# Altium PCB PCB1.PcbDoc
Units mil, origin at the board's own origin, x right, y up, seen from the top; angles counter-clockwise.
Board outline 720 x 1350 mil, 4 copper layers (Top Copper, Signal Layer 1, Signal Layer 2, Bottom Copper), stack 46.063 mil thick; 29 components, 18 nets, 96 pads, 42 vias.
Unrouted connection lines stored in the file: 31.
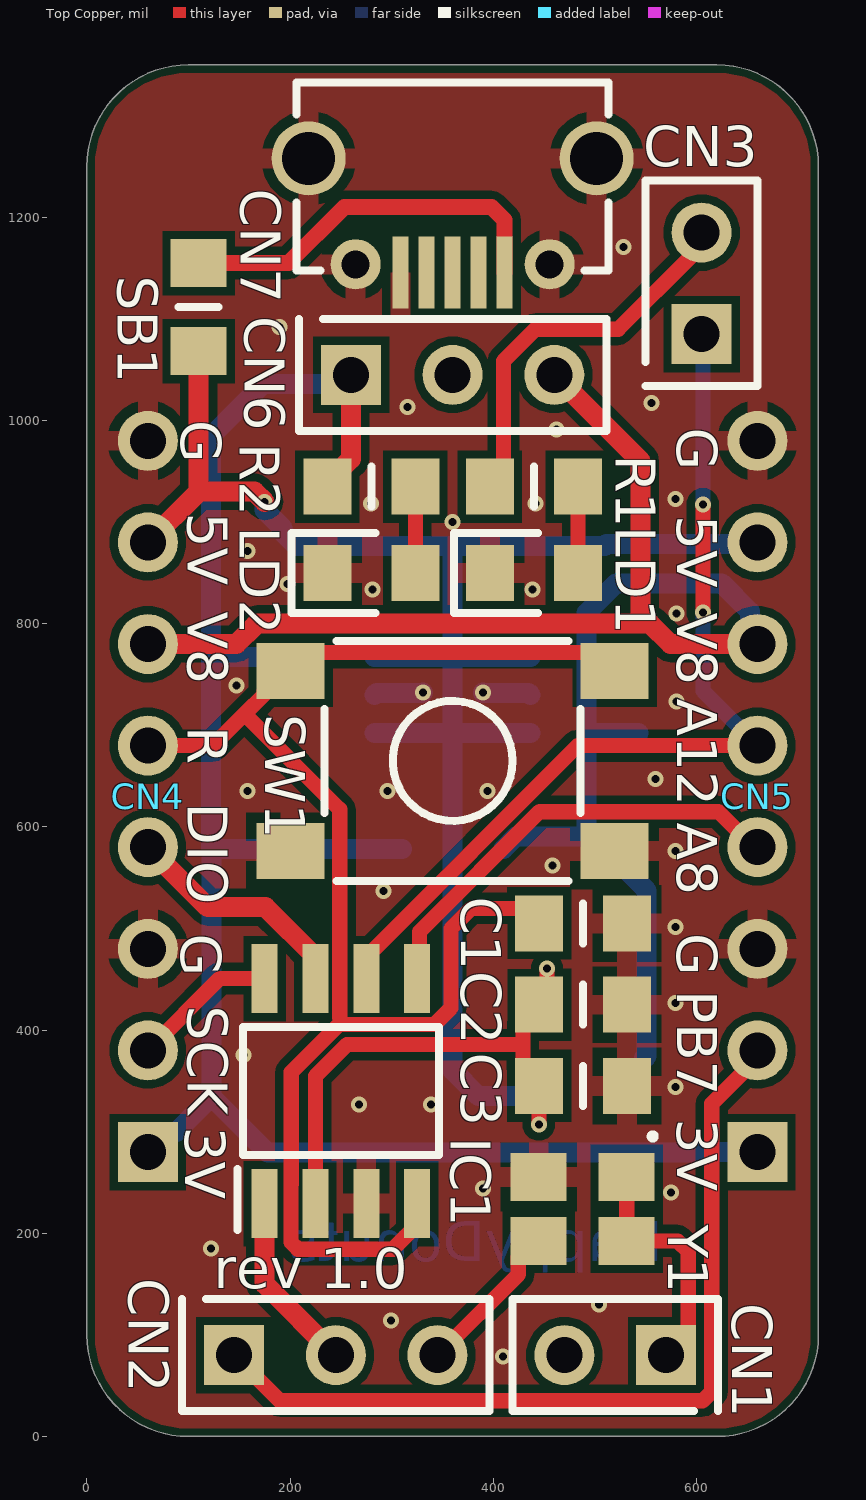
[diagram p0: Top Copper view]
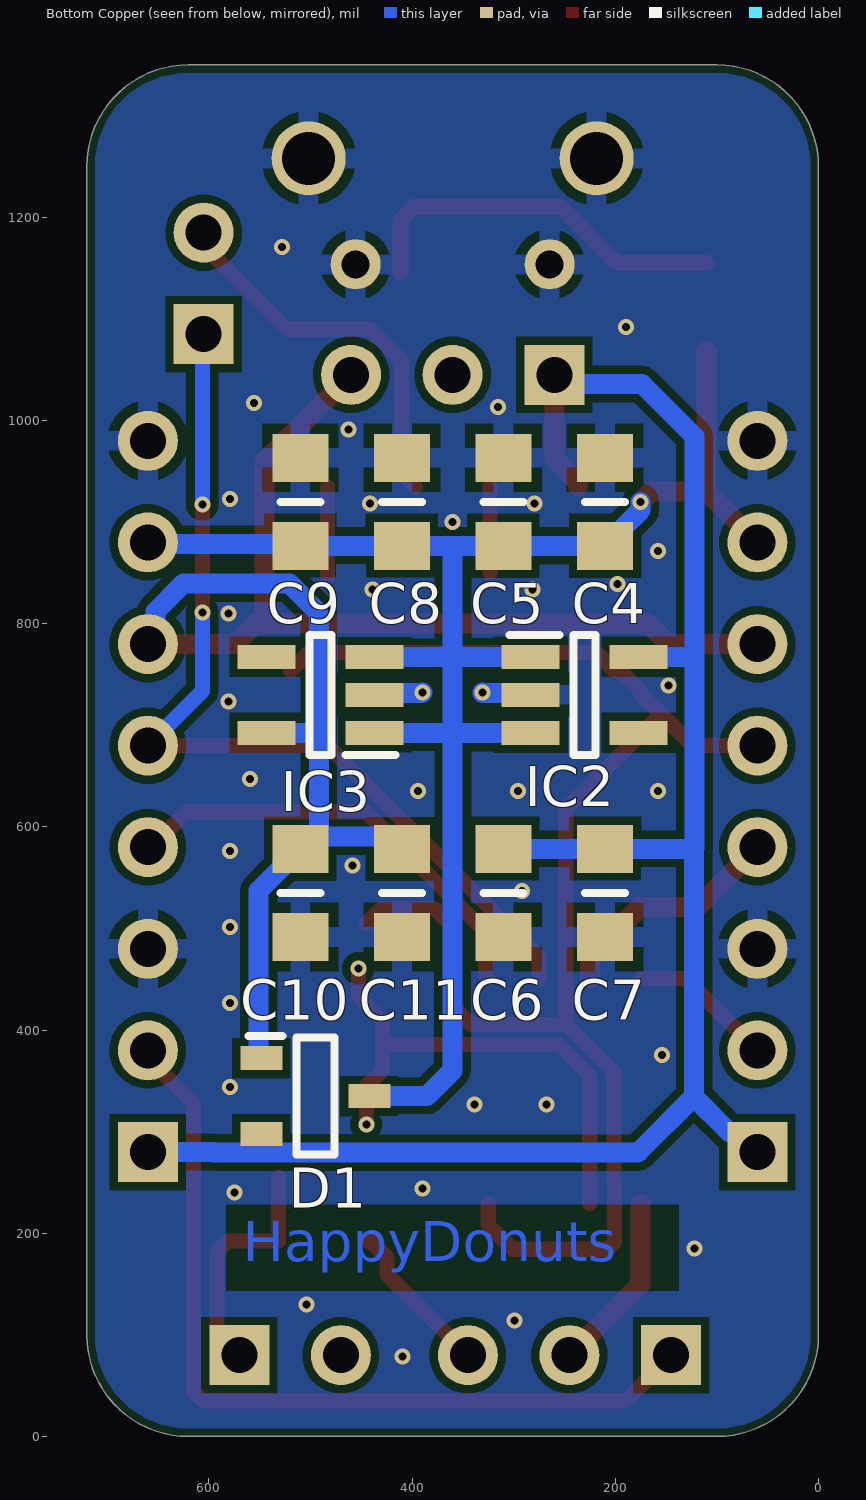
[diagram p1: Bottom Copper view, seen from below]
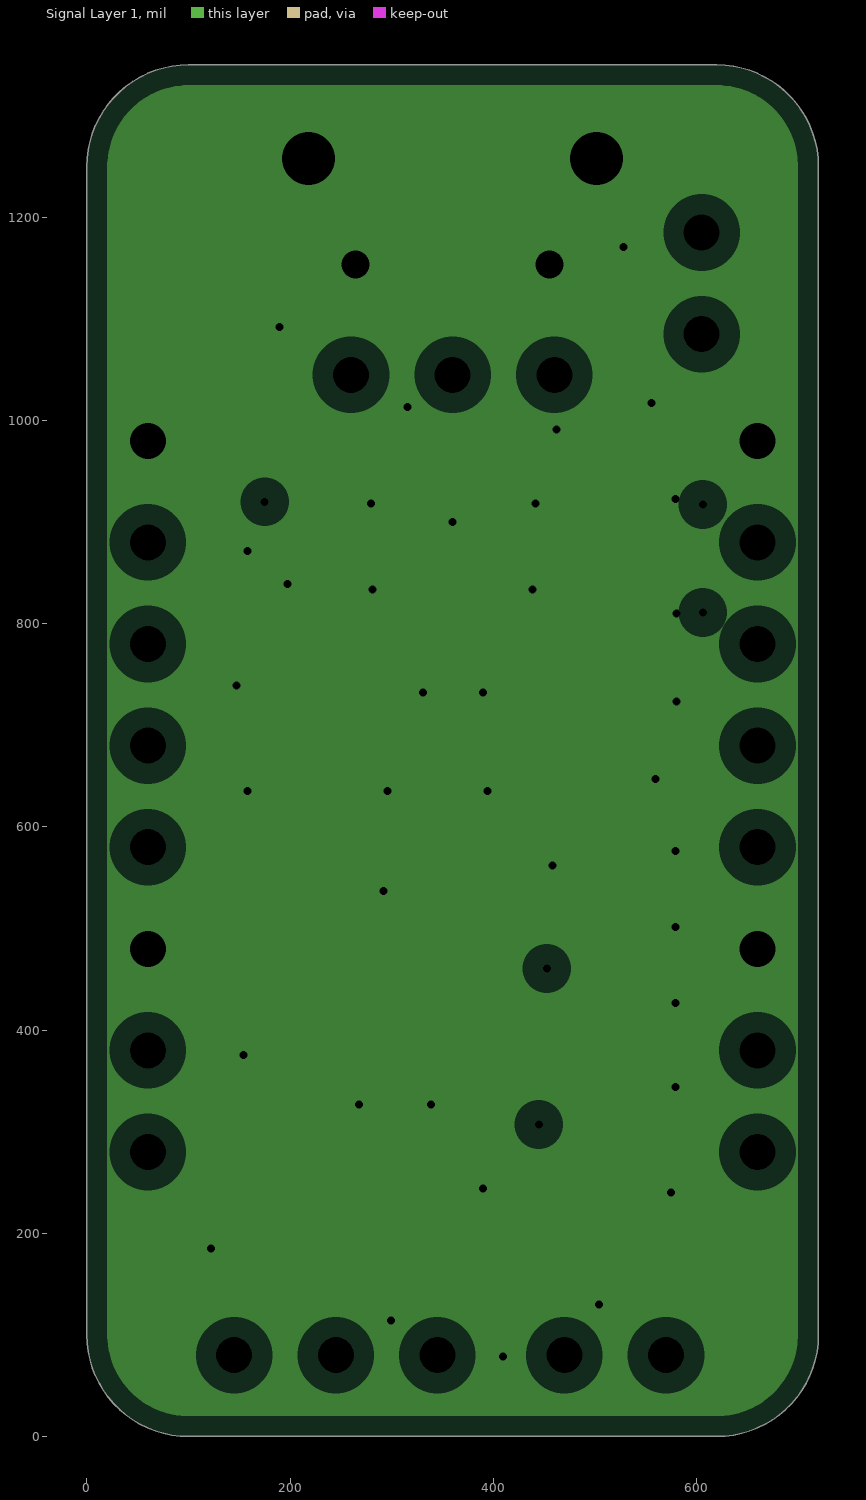
[diagram p2: Signal Layer 1, clearances drawn from the general rule]
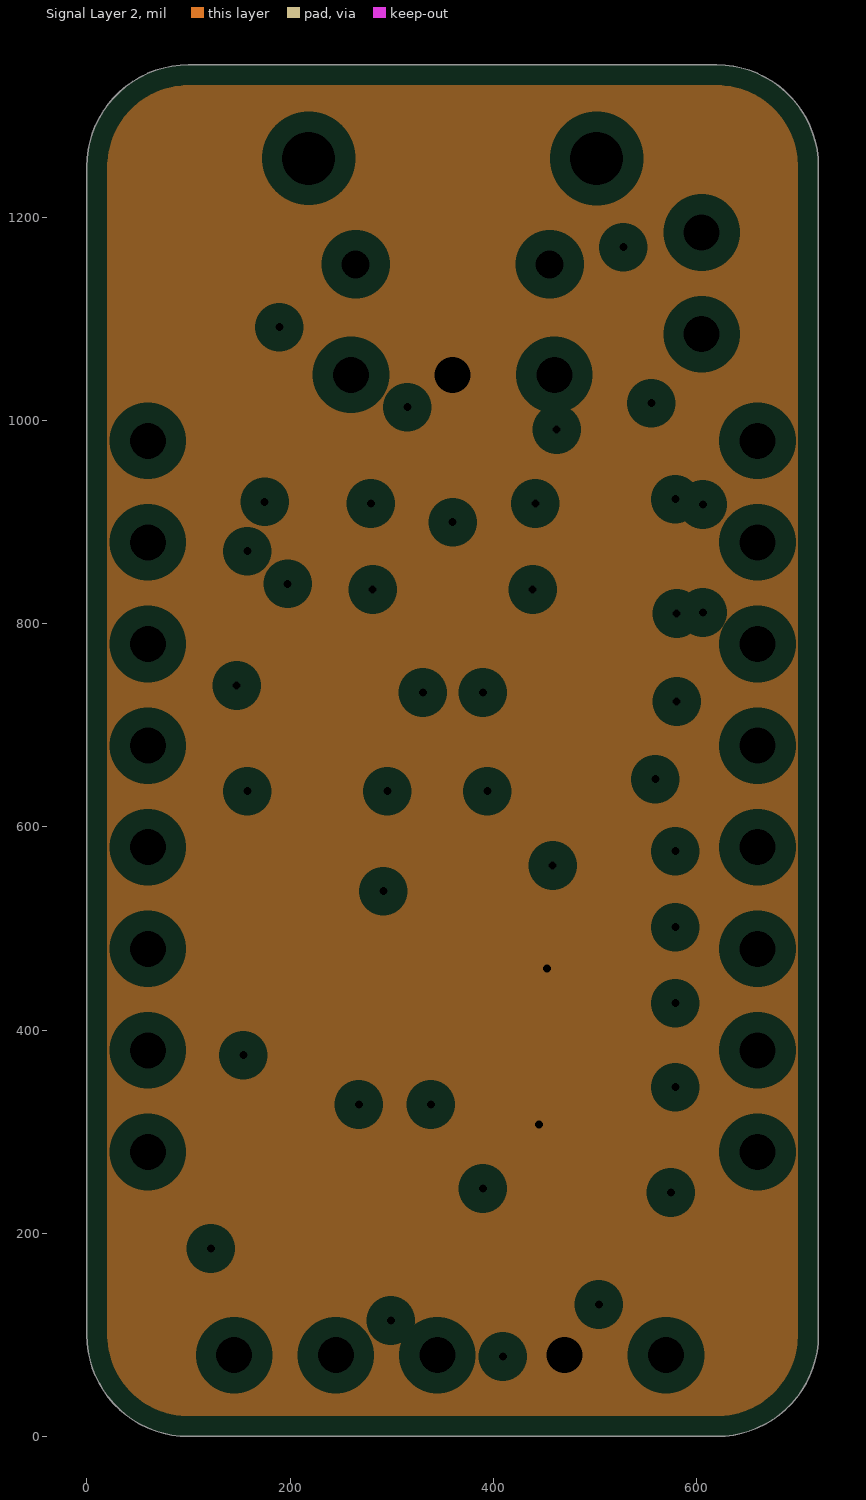
[diagram p3: Signal Layer 2, clearances drawn from the general rule]
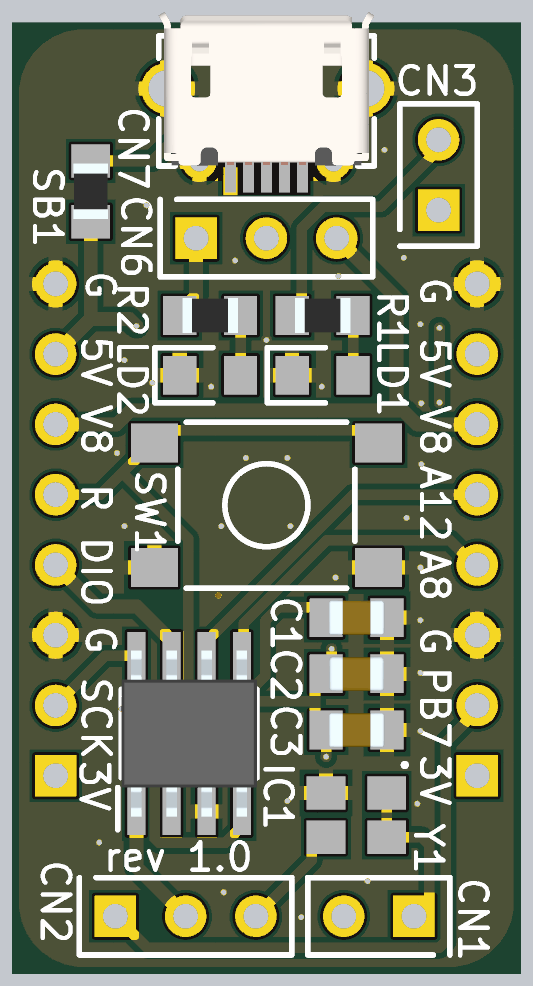
[diagram p4: 3D render of the assembled board from above, using the file's embedded part models]
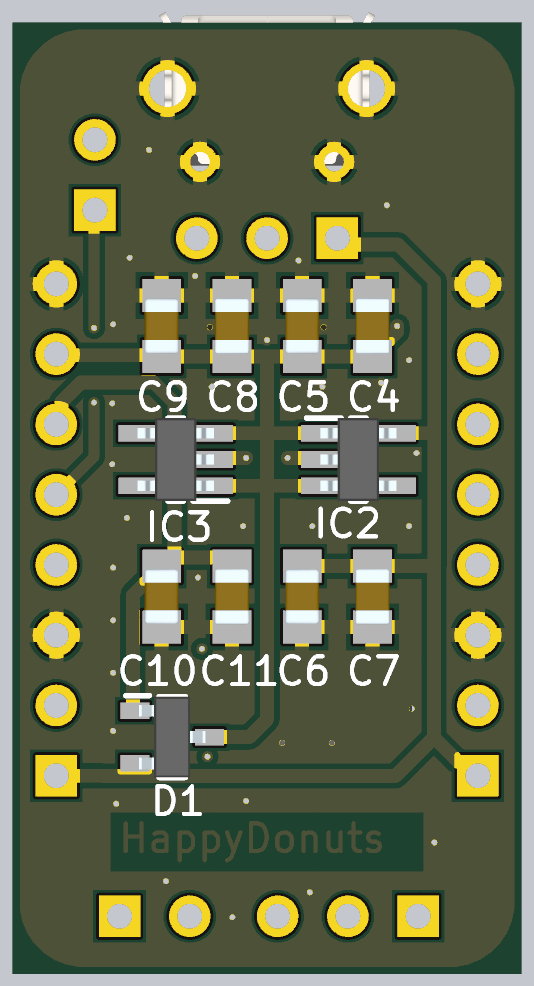
[diagram p5: 3D render of the assembled board from below, using the file's embedded part models]

## Layer stack, top to bottom
Top Mask: solder mask 0.591, Solder Resist, Dk 3.8
Top Copper: signal copper 1.378
Dielectric 1: prepreg 7.874, 7628, Dk 4.6
Signal Layer 1: plane copper 0.689, net GND
Core: core 26.181, FR-4, Dk 4.5
Signal Layer 2: plane copper 0.689, net VDD
Dielectric 2: prepreg 7.874, 7628, Dk 4.6
Bottom Copper: signal copper 1.378
Bottom Mask: solder mask 0.591, Solder Resist, Dk 3.8

## Board outline
0,100 0,1250 cw(c100,1250) 100,1350 620,1350 cw(c620,1250) 720,1250 720,100 cw(c620,100) 620,0 100,0 cw(c100,100)

## Design rules (kind name [scope] priority, off if disabled: settings)
BoardOutlineClearance [All] p1: gap=7.87 ignorepadtopadclearanceinfootprint=FALSE except(15.75: Arc-SplitBarrior Arc-SplitContinuation Track-SplitBarrior Track-SplitContinuation SMDPad-SplitBarrior SMDPad-SplitContinuation THPad-SplitBarrior THPad-SplitContinuation Via-SplitBarrior Via-SplitContinuation Fill-SplitBarrior Fill-SplitContinuation Poly-SplitBarrior Poly-SplitContinuation Region-SplitBarrior Region-SplitContinuation Text-SplitBarrior Text-SplitContinuation)
Clearance "Clearance Bottom Layer" [OnLayer('Bottom Layer')] p1: gap=8 ignorepadtopadclearanceinfootprint=TRUE except(10: Arc-Text Track-Text SMDPad-Text THPad-Text Via-Text Fill-Text Poly-Text Region-Text Text-Text)
Clearance "Clearance Top Layer" [OnLayer('Top Layer')] p2: gap=8 ignorepadtopadclearanceinfootprint=TRUE except(10: Arc-Text Track-Text SMDPad-Text THPad-Text Via-Text Fill-Text Poly-Text Region-Text Text-Text)
Clearance [All] p3: gap=7.87 ignorepadtopadclearanceinfootprint=FALSE except(3.5: Arc-Arc Arc-Track Arc-SMDPad Track-Track Track-SMDPad SMDPad-SMDPad; 5: Arc-Via Track-Via SMDPad-Via THPad-Via Via-Via; 10: Arc-Text Track-Text SMDPad-Text THPad-Text Via-Text Fill-Text Poly-Text Region-Text Text-Text)
HoleSize [All] p1: absolutevalues=TRUE maxlimit=248.03 minlimit=7.87 maxpercent=80.000 minpercent=20.000
MinimumAnnularRing [All] p1: minimumring=3
MinimumSolderMaskSliver [All] p1: minsoldermaskwidth=3.94
PlaneClearance [All] p1: clearance=20
PlaneConnect [All] p1: planeconnectstyle=Direct reliefexpansion=20 reliefentries=4 reliefconductorwidth=10 reliefairgap=10
PolygonConnect PolygonConnect_1 [All] p1: thpad.connectstyle=Relief thpad.reliefconductorwidth=20 thpad.reliefentries=4 thpad.polygonreliefangle="90 Angle" thpad.airgapwidth=10 smdpad.connectstyle=Relief smdpad.reliefconductorwidth=20 smdpad.reliefentries=4 smdpad.polygonreliefangle="90 Angle" smdpad.airgapwidth=10 via.connectstyle=Direct via.reliefconductorwidth=20 via.reliefentries=4 via.polygonreliefangle="90 Angle" via.airgapwidth=10
RoutingCorners [All] p1: cornerstyle=Round minsetback=100 maxsetback=100
RoutingVias [All] p1: holewidth=7.87 width=15.75 viastyle="Through Hole" minholewidth=7.87 minwidth=15.75 maxholewidth=7.87 maxwidth=15.75
SilkToSilkClearance [All] p1: silktosilkclearance=3.94
SilkToSolderMaskClearance [IsPad] p1: minsilkscreentomaskgap=3.94 clearancetoexposedcopper=TRUE
SolderMaskExpansion [All] p1: expansion=4 istentingtop=FALSE
Width [All] p1: maxlimit=100 minlimit=3.5 preferedwidth=15
23 further rules are at their usual default settings.

## Components (designator, comment, footprint, x,y, rotation, side; value= is the part's Value field where it differs from the comment)
C1 "C0805C104K5RAC7411" CAPC2012X94N 488.31,505 r180 top value=100nF
C2 "CL21A475KPFNNNE" CAPC2012X135N 488.31,425 r180 top value=4.7uF
C3 "C0805C104K5RAC7411" CAPC2012X94N 488.31,345 r180 top value=100nF
C4 "C0805C104K5RAC7411" CAPC2012X94N 210,920 r270 bottom value=100nF
C5 "885012107015" CAPC2012X135N 310,920 r270 bottom value=1uF
C6 "885012107015" CAPC2012X135N 310,535 r90 bottom value=1uF
C7 "C0805C104K5RAC7411" CAPC2012X94N 210,535 r90 bottom value=100nF
C8 "C0805C104K5RAC7411" CAPC2012X94N 410,920 r270 bottom value=100nF
C9 "885012107015" CAPC2012X135N 510,920 r270 bottom value=1uF
C10 "885012107015" CAPC2012X135N 510,535 r90 bottom value=1uF
C11 "C0805C104K5RAC7411" CAPC2012X94N 410,535 r90 bottom value=100nF
CN1 "CN_2PIN" CN_2PIN 570,80 r180 top
CN2 "CN_3PIN" CN_3PIN 145,80 r0 top
CN3 "CN_2PIN" CN_2PIN 605,1085 r90 top
CN4 "CN_8PIN" CN_8PIN 60,280 r90 top
CN5 "CN_8PIN" CN_8PIN 660,280 r90 top
CN6 "CN_3PIN" CN_3PIN 260,1045 r0 top
CN7 "920-E52A2021S10100" USB307530A 360,1258 r180 top
D1 "BAT54C_R1_00001" SOT95P240X110-3N 495,335 r180 bottom
IC1 "STM32G031J6M6" SOIC127P600X175-8N 250,340 r90 top
IC2 "NCP115ASN330T2G" SOT95P275X110-5N 230,730 r180 bottom value=3.3V/300mA
IC3 "MIC5365-1.8YD5-TR" SOT95P275X110-5N 490,730 r0 bottom value=1.8V/150mA
LD1 "150080YS75000_Y" LEDC2012X85N_Y 440,850 r0 top value=Yellow
LD2 "150080VS75000_G" LEDC2012X85N_G 280,850 r0 top value=Green
R1 "RC0805FR-07510RL" RESC2012X60N 440,935 r0 top value=510
R2 "RC0805FR-07510RL" RESC2012X60N 280,935 r0 top value=510
SB1 "RC0805FR-070RL" RESC2012X60N 110,1111.69 r270 top
SW1 "EVP-BT3G4A000" EVP-BT3G4A000 360,665 r180 top
Y1 "ASEKDV-32.768kHz-LC-T" ASEKDV-32.768kHz-LC-T 488,224 r180 top value=32.768kHz

## Footprints (in the part's own frame and the unit in brackets; to place one, negate y for a bottom-side part, rotate by r counter-clockwise, add the part's x,y. Pads: shape width x height; smd on the part's side, far side on the other; paste and mask are expansions set on the pad)
ASEKDV-32.768kHz-LC-T [mm]
  rect 1.4x1.2 smd: 1(-1.1,-0.8) 2(1.1,-0.8) 3(1.1,0.8) 4(-1.1,0.8)
  silkscreen extent -1.8,-1.86 -1.7,-1.76, body extent -1.6,-1.25 1.6,1.25, height 1.2
CAPC2012X94N [mm]
  rect 1.2x1.4 smd: 1(-1.1,0) 2(1.1,0)
  silkscreen extent 0,-0.5 0,0.5, body extent -1,-0.63 1,0.63, height 0.94
CAPC2012X135N [mm]
  rect 1.2x1.4 smd: 1(-1.1,0) 2(1.1,0)
  silkscreen extent 0,-0.5 0,0.5, body extent -1,-0.63 1,0.63, height 1.35
CN_2PIN [mm] "Connector; Edge; 22 Position"
  rect 1.5x1.5 hole 0.9: 1(0,0)
  round 1.5 hole 0.9: 2(2.54,0)
  silkscreen extent -1.3,-1.4 3.84,1.4, body extent -1.17,-1.25 3.91,1.25, height 8.2
CN_3PIN [mm] "Connector; Edge; 22 Position"
  rect 1.5x1.5 hole 0.9: 1(0,0)
  round 1.5 hole 0.9: 2(2.54,0) 3(5.08,0)
  silkscreen extent -1.3,-1.4 6.38,1.4, body extent -1.17,-1.25 6.45,1.25, height 8.2
CN_8PIN [mm] "Connector; Edge; 22 Position"
  rect 1.5x1.5 hole 0.9: 1(0,0)
  round 1.5 hole 0.9: 2(2.54,0) 3(5.08,0) 4(7.62,0) 5(10.16,0) 6(12.7,0) 7(15.24,0) 8(17.78,0)
  body extent -1.17,-1.25 19.15,1.25, height 3
EVP-BT3G4A000 [mm]
  rect 1.7x1.4 smd: 1(-4.05,2.25) 2(4.05,2.25) 3(4.05,-2.25) 4(-4.05,-2.25)
  silkscreen extent -3.2,-3 3.2,3, body extent -3.2,-3 3.2,3, height 4.3
LEDC2012X85N_G [mm]
  rect 1.2x1.4 smd: 1(-1.1,0) 2(1.1,0)
  silkscreen extent -2,-1 0.1,1, body extent -1,-0.63 1,0.63, height 1.1
LEDC2012X85N_Y [mm]
  rect 1.2x1.4 smd: 1(-1.1,0) 2(1.1,0)
  silkscreen extent -2,-1 0.1,1, body extent -1,-0.63 1,0.63, height 1.1
RESC2012X60N [mm]
  rect 1.2x1.4 smd: 1(-1.1,0) 2(1.1,0)
  silkscreen extent 0,-0.5 0,0.5, body extent -1,-0.63 1,0.63, height 0.6
SOIC127P600X175-8N [mm]
  rect 1.725x0.65 smd: 1(-2.812,1.905) 2(-2.812,0.635) 3(-2.812,-0.635) 4(-2.812,-1.905) 5(2.812,-1.905) 6(2.812,-0.635) 7(2.812,0.635) 8(2.812,1.905)
  silkscreen extent -3.47,-2.45 1.6,2.58, body extent -3,-2.45 3,2.45, height 1.75
SOT95P240X110-3N [mm]
  rect 1.05x0.6 smd: 1(-1.35,0.95) 2(-1.35,-0.95) 3(1.35,0)
  silkscreen extent -1.68,-1.46 0.48,1.5, body extent -1.2,-1.46 1.2,1.46, height 1.1
SOT95P275X110-5N [mm]
  rect 1.45x0.6 smd: 1(-1.35,0.95) 2(-1.35,0) 3(-1.35,-0.95) 4(1.35,-0.95) 5(1.35,0.95)
  silkscreen extent -1.88,-1.5 0.28,1.5, body extent -1.38,-1.5 1.38,1.5, height 1.1
USB307530A [mm]
  rect 0.4x1.8 smd: 1(-1.3,2.85) 2(-0.65,2.85) 3(0,2.85) 4(0.65,2.85) 5(1.3,2.85)
  round 1.25 hole 0.7: 6(2.425,2.65) 9(-2.425,2.65)
  round 1.85 hole 1.328: 7(3.6,0) 8(-3.6,0)
  silkscreen extent -3.9,-1.9 3.9,2.8, body extent -3.9,-2.77 3.9,2.77, height 2.49

## Part data
C1 C3 C4 C7 C8 C11: "Capacitor", Manufacturer_Name=Kemet, Mouser Part Number=80-C0805C104K5RACLR, Arrow Part Number=C0805C104K5RAC7411, Arrow Price/Stock=https://www.arrow.com/en/products/c0805c104k5rac7411/kemet-corporation, Datasheet Link=https://www.mouser.com/datasheet/2/212/KEM_C1002_X7R_SMD-1102033.pdf, Height=0.88mm, Manufacturer_Part_Number=C0805C104K5RAC7411, Mouser Price/Stock=https://www.mouser.co.uk/ProductDetail/KEMET/C0805C104K5RAC7411?qs=jbRM9o5BbzPcVXF0wW9AYg%3D%3D
C2: "Capacitor", Manufacturer_Name="Wurth Elektronik", Mouser Part Number=187-CL21A475KPFNNNE, Datasheet Link=https://www.mouser.fr/datasheet/2/585/MLCC-1837944.pdf, Height=1.35mm, Manufacturer_Part_Number=CL21A475KPFNNNE, Mouser Price/Stock=https://www.mouser.co.uk/ProductDetail/Wurth-Elektronik/885012107015?qs=0KOYDY2FL2%252BNQREZP%252BtVoQ%3D%3D
C5 C6 C9 C10: "Capacitor", Manufacturer_Name="Wurth Elektronik", Mouser Part Number=710-885012107015, Datasheet Link=https://katalog.we-online.com/pbs/datasheet/885012107015.pdf, Height=1.35mm, Manufacturer_Part_Number=885012107015, Mouser Price/Stock=https://www.mouser.co.uk/ProductDetail/Wurth-Elektronik/885012107015?qs=0KOYDY2FL2%252BNQREZP%252BtVoQ%3D%3D
CN1 CN2 CN3 CN4 CN5 CN6: "Connector"
CN7: "USB connector", Arrow Part Number=TB67H450FNG,EL, Manufacturer_Name="Jing Extension of the Electronic Co.", Arrow Price/Stock=https://www.arrow.com/en/products/tb67h450fngel/toshiba?region=nac, Datasheet Link=http://toshiba.semicon-storage.com/info/docget.jsp?did=65346&prodName=TB67H450FNG, Height=1.9mm, Manufacturer_Part_Number=https://datasheet.lcsc.com/lcsc/2103051832_Jing-Extension-of-the-Electronic-Co--920-E52A2021S10100_C10418.pdf, Mouser Part Number=920-E52A2021S10100, Mouser Price/Stock=https://www.mouser.co.uk/ProductDetail/Toshiba/TB67H450FNGEL?qs=h6V4JsTaLXeReNg2bp0jug%3D%3D
D1: "Schottky Diode", Manufacturer_Name=PANJIT, Mouser Part Number=241-BAT54C_R1_00001, Datasheet Link=https://www.mouser.com/datasheet/2/1057/BAT54_SERIES-1868988.pdf, Height=1.1mm, Manufacturer_Part_Number=BAT54C_R1_00001, Mouser Price/Stock=https://www.mouser.co.uk/ProductDetail/Panjit/BAT54C_R1_00001?qs=sPbYRqrBIVlWgFH05T87cA%3D%3D
IC1: "Integrated Circuit", Manufacturer_Name=STMicroelectronics, Mouser Part Number=511-STM32G031J6M6, Datasheet Link=https://www.mouser.fr/datasheet/2/389/dm00613879-1799607.pdf, Height=1.75mm, Manufacturer_Part_Number=STM32G031J6M6
IC2: "Integrated Circuit", Manufacturer_Name="ON Semiconductor", Mouser Part Number=863-NCP115ASN330T2G, Arrow Part Number=NCP115ASN330T2G, Arrow Price/Stock=https://www.arrow.com/en/products/ncp115asn330t2g/on-semiconductor?region=europe, Datasheet Link=http://www.onsemi.com/pub/Collateral/NCP115-D.PDF, Height=1.1mm, Manufacturer_Part_Number=NCP115ASN330T2G, Mouser Price/Stock=https://www.mouser.co.uk/ProductDetail/onsemi/NCP115ASN330T2G?qs=byeeYqUIh0PuUump9WHLUw%3D%3D
IC3: "Integrated Circuit", Manufacturer_Name=Microchip, Mouser Part Number=998-MIC5365-1.8YD5TR, Arrow Part Number=MIC5365-1.8YD5-TR, Arrow Price/Stock=https://www.arrow.com/en/products/mic5365-1.8yd5-tr/microchip-technology?region=nac, Datasheet Link=http://ww1.microchip.com/downloads/en/DeviceDoc/mic5365.pdf, Height=1mm, Manufacturer_Part_Number=MIC5365-1.8YD5-TR, Mouser Price/Stock=https://www.mouser.co.uk/ProductDetail/Microchip-Technology-Micrel/MIC5365-18YD5-TR?qs=U6T8BxXiZAVg0QgzW6KbsQ%3D%3D
LD1: "LED", Manufacturer_Name="Wurth Elektronik", Manufacturer_Part_Number=150080YS75000, Mouser Part Number=710-150080YS75000, Datasheet Link=https://katalog.we-online.de/led/datasheet/150080YS75000.pdf, Height=0.8mm, Mouser Price/Stock=https://www.mouser.co.uk/ProductDetail/Wurth-Elektronik/150080YS75000?qs=LlUlMxKIyB3k0fZGrDMI2w%3D%3D
LD2: "LED", Manufacturer_Name="Wurth Elektronik", Manufacturer_Part_Number=150080VS75000, Mouser Part Number=710-150080VS75000, Datasheet Link=https://www.mouser.fr/datasheet/2/445/150080VS75000-1714385.pdf, Height=0.8mm
R1 R2: "Resistor", Manufacturer_Name="YAGEO (PHYCOMP)", Mouser Part Number=603-RC0805FR-07510RL, Datasheet Link=https://datasheet.datasheetarchive.com/originals/distributors/Datasheets_SAMA/902f9e387b938f871d31120f5fc1d65e.pdf, Height=0.6mm, Manufacturer_Part_Number=RC0805FR-07510RL, Mouser Price/Stock=https://www.mouser.com/Search/Refine.aspx?Keyword=603-RC0805FR-07510RL
SB1: "Jumper (0 ohm)", Manufacturer_Name="YAGEO (PHYCOMP)", Mouser Part Number=603-RC0805FR-070RL, Datasheet Link=https://datasheet.datasheetarchive.com/originals/distributors/Datasheets_SAMA/902f9e387b938f871d31120f5fc1d65e.pdf, Height=0.6mm, Manufacturer_Part_Number=RC0805FR-070RL, Mouser Price/Stock=https://www.mouser.co.uk/ProductDetail/YAGEO/RC0805FR-070RL?qs=fRxXYNj8ftF6kXqh1XbZJQ%3D%3D
SW1: "Tactile switch", Manufacturer_Name=Panasonic, Datasheet Link=https://www.mouser.fr/datasheet/2/315/sw_lt_eng_6s_th-2889044.pdf, Height=3.1mm, Manufacturer_Part_Number=EVP-BT3G4A000
Y1: "Crystal or Oscillator", Manufacturer_Name=ABRACON, Mouser Part Number=815-ASEKDV32768KHLCT, Datasheet Link=https://www.mouser.fr/datasheet/2/3/ABRC_S_A0012625913_1-2519507.pdf, Height=1.2mm, Manufacturer_Part_Number=ASEKDV-32.768kHz-LC-T

## Via types
v1: diameter 15.75, hole 7.87, Top Copper to Bottom Copper, tented both sides, 42 vias

## Nets (pads, with @x,y where several pads share a name; then routed paths per layer and width w, separated by ;. In a path a pad name is that pad's centre, name@x,y a point inside that pad or via, vN(x,y) a via of type N, cw(c..) or ccw(c..) an arc to the next point about the centre after c; other vN are vias at no path point)
1V8: C10.2 C11.2 CN4.6 CN5.6 CN6.3 D1.1 IC3.5 | length 1717.5
  Top Copper w19.68: CN4.6 147.08,780 165.68,798.61 ; 167.08,800 554.33,800 574.33,780 CN5.6 ; CN6.3 545,960 545,801.97
  Bottom Copper w19.68: C11.2 422.24,590.55 497.76,590.55 C10.2 513.94,578.31 527.72,564.53 527.72,560.59 550.9,537.41 550.9,374.37 548.93,372.4 D1.1 ; C10.2@491.65,594.02 491.65,692.91 ; IC3.5 491.97,692.6 491.65,692.91 ; CN5.6 652.47,787.53 652.47,812.1 624.84,839.73 520.83,839.73 491.65,810.55 491.65,692.91
3V3: C6.2 C7.2 CN4.1 CN5.1 CN6.1 D1.2 IC2.5 R2.1 | length 1822.1
  Top Copper w19.68: R2.1 236.69,938.94 260,962.24 CN6.1
  Bottom Copper w19.68: CN4.1 79.69,299.69 87.99,299.69 122.72,334.41 ; IC2.5 125.67,767.4 122.05,763.78 ; CN6.1 250.83,1035.83 173.63,1035.83 122.05,984.25 122.05,763.78 ; C6.2 C7.2 122.48,578.31 ; CN5.1 594.83,280 594.41,279.58 177.55,279.58 122.72,334.41 ; 122.05,763.78 122.05,578.74 122.48,578.31 ; 122.48,578.31 122.48,334.65 122.72,334.41
5V: C4.2 C5.2 C8.2 C9.2 CN4.7 CN5.7 D1.3 IC2.1 IC2.3 IC3.1 IC3.3 SB1.2 | length 1701.8
  Top Copper w19.68: CN4.7 110,930 ; SB1.2 110,930 ; v1(175,920) 165,930 110,930
  Bottom Copper w19.68: v1(175,920) 175,911.69 192.28,894.41 192.28,890.47 C4.2@206.06,876.69 ; C4.2 C5.2 360,876.69 ; IC2.3 360,692.6 ; IC2.1 360,767.4 ; IC3.1 360,692.6 ; IC3.3 360,767.4 ; D1.3 385.47,335 360,360.47 360,692.6 ; CN5.7 658.35,878.35 511.65,878.35 C9.2 C8.2 360,876.69 ; 360,692.6 360,767.4 ; 360,767.4 360,876.69
GND: C1.1 C2.1 C3.1 C4.1 C5.1 C6.1 C7.1 C8.1 C9.1 C10.1 C11.1 CN4.3 CN4.8 CN5.3 CN5.8 CN7.5 CN7.6 CN7.7 CN7.8 CN7.9 IC1.3 IC2.2 IC3.2 LD1.1 LD2.1 SW1.1 SW1.2 Y1.2 | length 96.5
  Bottom Copper w19.68: IC2.2 285.12,731.97 330.39,731.97 v1(330.71,732.28) ; v1(389.76,732.28) 390.08,731.97 434.88,731.97 IC3.2
  other v1: 409.45,78.74 299.21,114.17 503.94,129.92 122.05,185.04 574.8,240.16 389.76,244.09 267.72,326.77 338.58,326.77 579.17,343.85 153.97,375.34 579.17,426.52 579.17,501.33 291.77,536.76 458.45,562.01 579.17,576.13 157.91,635.19 295.71,635.19 394.13,635.19 559.48,647 580.5,723.43 147.43,739.18 580.5,810.04 281.29,833.66 438.77,833.66 197.57,839.21 157.91,871.41 360,900 279.43,918.33 441.43,918.33 579.17,922.59 462.39,991.14 315.39,1013.14 555.55,1017.07 189.41,1091.88 527.99,1170.62
NetCN1_1: CN1.1 Y1.1 Y1.4 | length 239.1
  Top Copper w15: Y1.1 Y1.4 581.5,192.5 592,182 592,102 CN1.1
NetCN2_2: CN2.2 IC1.1 | length 190.2
  Top Copper w15: CN2.2 CN2.2@253.43,88.43
  Top Copper w19.68: IC1.1 175,150 CN2.2
NetCN2_3: CN2.3 Y1.3 | length 156.1
  Top Copper w15: CN2.3 424.63,159.63 424.63,176.38 440.76,192.5 Y1.3
NetCN3_2: CN3.2 R1.1 | length 384.1
  Top Copper w15: R1.1 410,948.31 410,1058.5 441.4,1089.9 522.97,1089.9 596.57,1163.5 596.57,1176.57 CN3.2
NetCN7_1: CN7.1 SB1.1 | length 380.7
  Top Copper w15.75: SB1.1 198.31,1155 253.31,1210 398.47,1210 411.18,1197.29 CN7.1
NetLD1_2: LD1.2 R1.2 | length 90
  Top Copper w15: LD1.2@483.31,845 R1.2
NetLD2_2: LD2.2 R2.2 | length 85
  Top Copper w15: LD2.2 R2.2
NRST: C1.2 CN4.5 IC1.4 SW1.3 SW1.4 | length 1532.5
  Top Copper w15: CN4.5 124.09,680 155.12,711.02 ; 248.8,412.2 248.8,617.35 155.12,711.02 ; IC1.4 325,208.13 301.2,184.33 207.65,184.33 200.79,191.2 200.79,248.03 201.2,248.45 201.2,358.68 244.21,401.69 248.03,405.51 342.11,405.51 358.27,421.67 358.27,500 377.95,519.68 430.32,519.68 C1.2 ; SW1.4 501.38,771.65 218.62,771.65 SW1.3 194.65,753.58 174.59,733.52 174.59,730.49 155.12,711.02
PA8: CN5.4 IC1.5 | length 443.1
  Top Copper w15: IC1.5 327.49,453.2 327.49,496.79 445.68,614.98 621.4,614.98 656.37,580 CN5.4
PA12: CN3.1 CN5.5 IC1.6 | length 920.2
  Top Copper w15: IC1.6 275,471.87 483.13,680 CN5.5 ; v1(606.3,811.02) v1(606.3,917.32)
  Bottom Copper w15: CN3.1 606.3,1083.7 v1(606.3,917.32) ; v1(606.3,811.02) 606.3,733.7 CN5.5
PB7: CN2.1 CN5.2 | length 846.8
  Top Copper w15: CN2.1 189.9,35.1 605.9,35.1 615.1,44.3 615.1,327.74 660,372.65 CN5.2
SWCLK: CN4.2 IC1.8 | length 144.3
  Top Copper w15: CN4.2 130.71,450.71 IC1.8
SWDIO: CN4.4 IC1.7 | length 231
  Top Copper w19.68: CN4.4 119.02,520.98 175.89,520.98 225,471.87 IC1.7
VDD: C2.2 C3.2 CN1.2 CN6.2 IC1.2 | length 512.5
  Top Copper w15: IC1.2 225,354.92 255.91,385.83 429.13,385.83 ; v1(444.88,307.09) 444.88,344.88 C3.2 429.13,360.87 429.13,409.13 452.76,432.76 v1(452.76,460.63)
pads on no net: CN7.2 CN7.3 CN7.4 IC2.4 IC3.4

## Polygon pours and split planes (outlines as drawn)
GND on Bottom Copper "GND_L04_P004" (solid, pour order 4): -96.46,1576.77 836.61,1576.77 1061.02,1352.36 950.79,1242.13 950.79,-155.51 -159.45,-155.51 -171.26,-143.7
GND on Top Copper "GND_L01_P001" (solid, pour order 1): -300.76,1570.88 -210.2,1480.33 1171.69,1480.33 1171.69,-251.95 1010.27,-413.37 915.78,-318.88 -395.24,-318.88
VDD on Signal Layer 2 (split plane): 627.84,1329.61 635.61,1328.46 643.22,1326.55 650.61,1323.91 657.71,1320.55 664.44,1316.51 670.75,1311.84 676.57,1306.57 681.84,1300.75 686.51,1294.44 690.55,1287.71 693.91,1280.61 696.55,1273.22 698.46,1265.61 699.61,1257.84 699.97,1250.63 699.9,1250 699.9,100 699.97,99.37 699.61,92.16 698.46,84.39 696.55,76.78 693.91,69.39 690.55,62.29 686.51,55.56 681.84,49.25 676.57,43.43 670.75,38.16 664.44,33.49 657.71,29.45 650.61,26.09 643.22,23.45 635.61,21.54 627.84,20.39 620.63,20.03 620,20.1 100,20.1 99.37,20.03 92.16,20.39 84.39,21.54 76.78,23.45 69.39,26.09 62.29,29.45 55.56,33.49 49.25,38.16 43.43,43.43 38.16,49.25 33.49,55.56 29.45,62.29 26.09,69.39 23.45,76.78 21.54,84.39 20.39,92.16 20.03,99.37 20.1,100 20.1,1250 20.03,1250.63 20.39,1257.84 21.54,1265.61 23.45,1273.22 26.09,1280.61 29.45,1287.71 33.49,1294.44 38.16,1300.75 43.43,1306.57 49.25,1311.84 55.56,1316.51 62.29,1320.55 69.39,1323.91 76.78,1326.55 84.39,1328.46 92.16,1329.61 99.37,1329.97 100,1329.9 620,1329.9 620.63,1329.97
GND on Signal Layer 1 (split plane): 627.84,1329.61 635.61,1328.46 643.22,1326.55 650.61,1323.91 657.71,1320.55 664.44,1316.51 670.75,1311.84 676.57,1306.57 681.84,1300.75 686.51,1294.44 690.55,1287.71 693.91,1280.61 696.55,1273.22 698.46,1265.61 699.61,1257.84 699.97,1250.63 699.9,1250 699.9,100 699.97,99.37 699.61,92.16 698.46,84.39 696.55,76.78 693.91,69.39 690.55,62.29 686.51,55.56 681.84,49.25 676.57,43.43 670.75,38.16 664.44,33.49 657.71,29.45 650.61,26.09 643.22,23.45 635.61,21.54 627.84,20.39 620.63,20.03 620,20.1 100,20.1 99.37,20.03 92.16,20.39 84.39,21.54 76.78,23.45 69.39,26.09 62.29,29.45 55.56,33.49 49.25,38.16 43.43,43.43 38.16,49.25 33.49,55.56 29.45,62.29 26.09,69.39 23.45,76.78 21.54,84.39 20.39,92.16 20.03,99.37 20.1,100 20.1,1250 20.03,1250.63 20.39,1257.84 21.54,1265.61 23.45,1273.22 26.09,1280.61 29.45,1287.71 33.49,1294.44 38.16,1300.75 43.43,1306.57 49.25,1311.84 55.56,1316.51 62.29,1320.55 69.39,1323.91 76.78,1326.55 84.39,1328.46 92.16,1329.61 99.37,1329.97 100,1329.9 620,1329.9 620.63,1329.97

## Other copper
Bottom Copper:
  text "HappyDonuts" at 566.63,172.65 h39.37

## Silkscreen, mask and mechanical layers (free items; w line width, h text height)
Top Overlay:
  text "G" at 93,1000 h39.37 r270
  text "G" at 581.02,992.98 h39.37 r270
  text "5V" at 99.02,908.98 h39.37 r270
  text "5V" at 581.02,906.98 h39.37 r270
  text "V8" at 99.02,811.98 h39.37 r270
  text "V8" at 581.02,810.98 h39.37 r270
  text "A12" at 581.02,725.98 h39.37 r270
  text "R" at 99.02,698.98 h39.37 r270
  text "DIO" at 99.02,623.98 h39.37 r270
  text "A8" at 581.02,603.98 h39.37 r270
  text "G" at 93,495 h39.37 r270
  text "G" at 581.02,495.3 h39.37 r270
  text "PB7" at 581.02,438.98 h39.37 r270
  text "SCK" at 99.02,423.98 h39.37 r270
  text "3V" at 581.02,312.98 h39.37 r270
  text "3V" at 96.57,305 h39.37 r270
  text "rev 1.0" at 124.98,145.98 h39.37
Board Shape:
  the board outline again, w0